# Altium PCB D1.PcbDoc (part 1 of 2)
Units mm, origin at the board's own origin, x right, y up, seen from the top; angles counter-clockwise.
Board outline 109.98 x 80.01 mm, 2 copper layers (Top Layer, Bottom Layer); 249 components, 156 nets, 1213 pads, 95 vias.
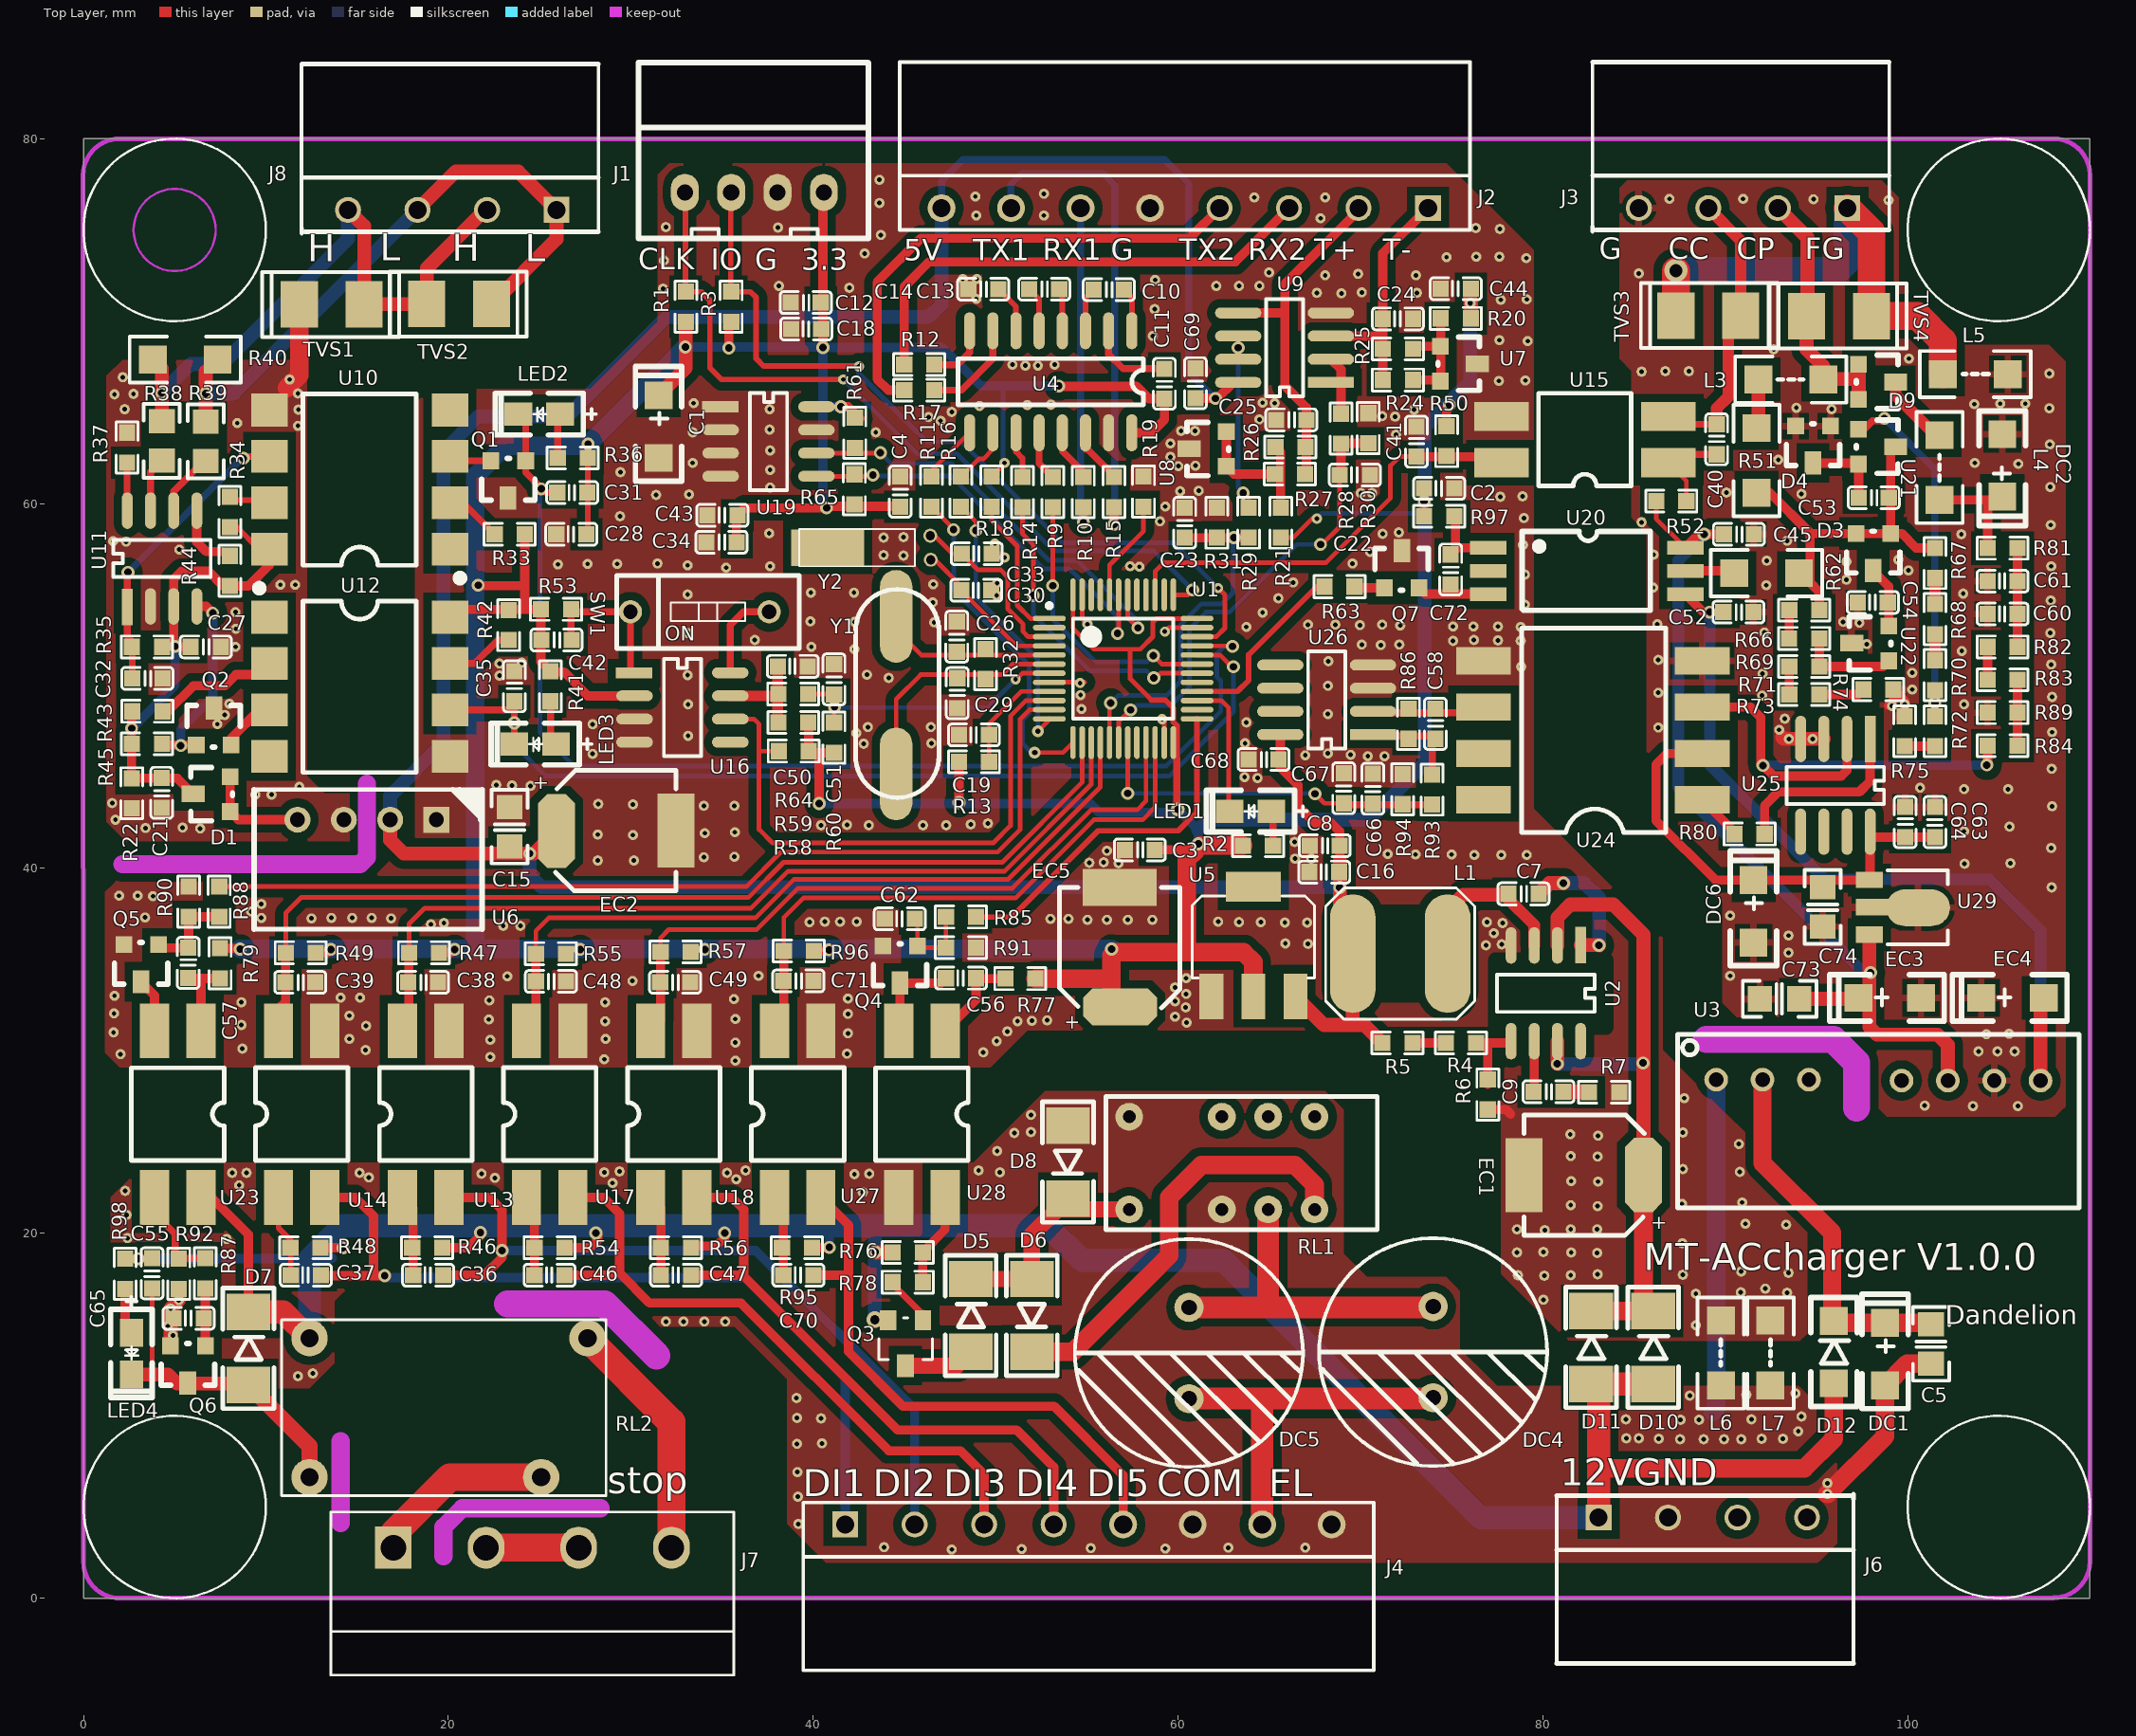
[diagram p0: Top Layer view]
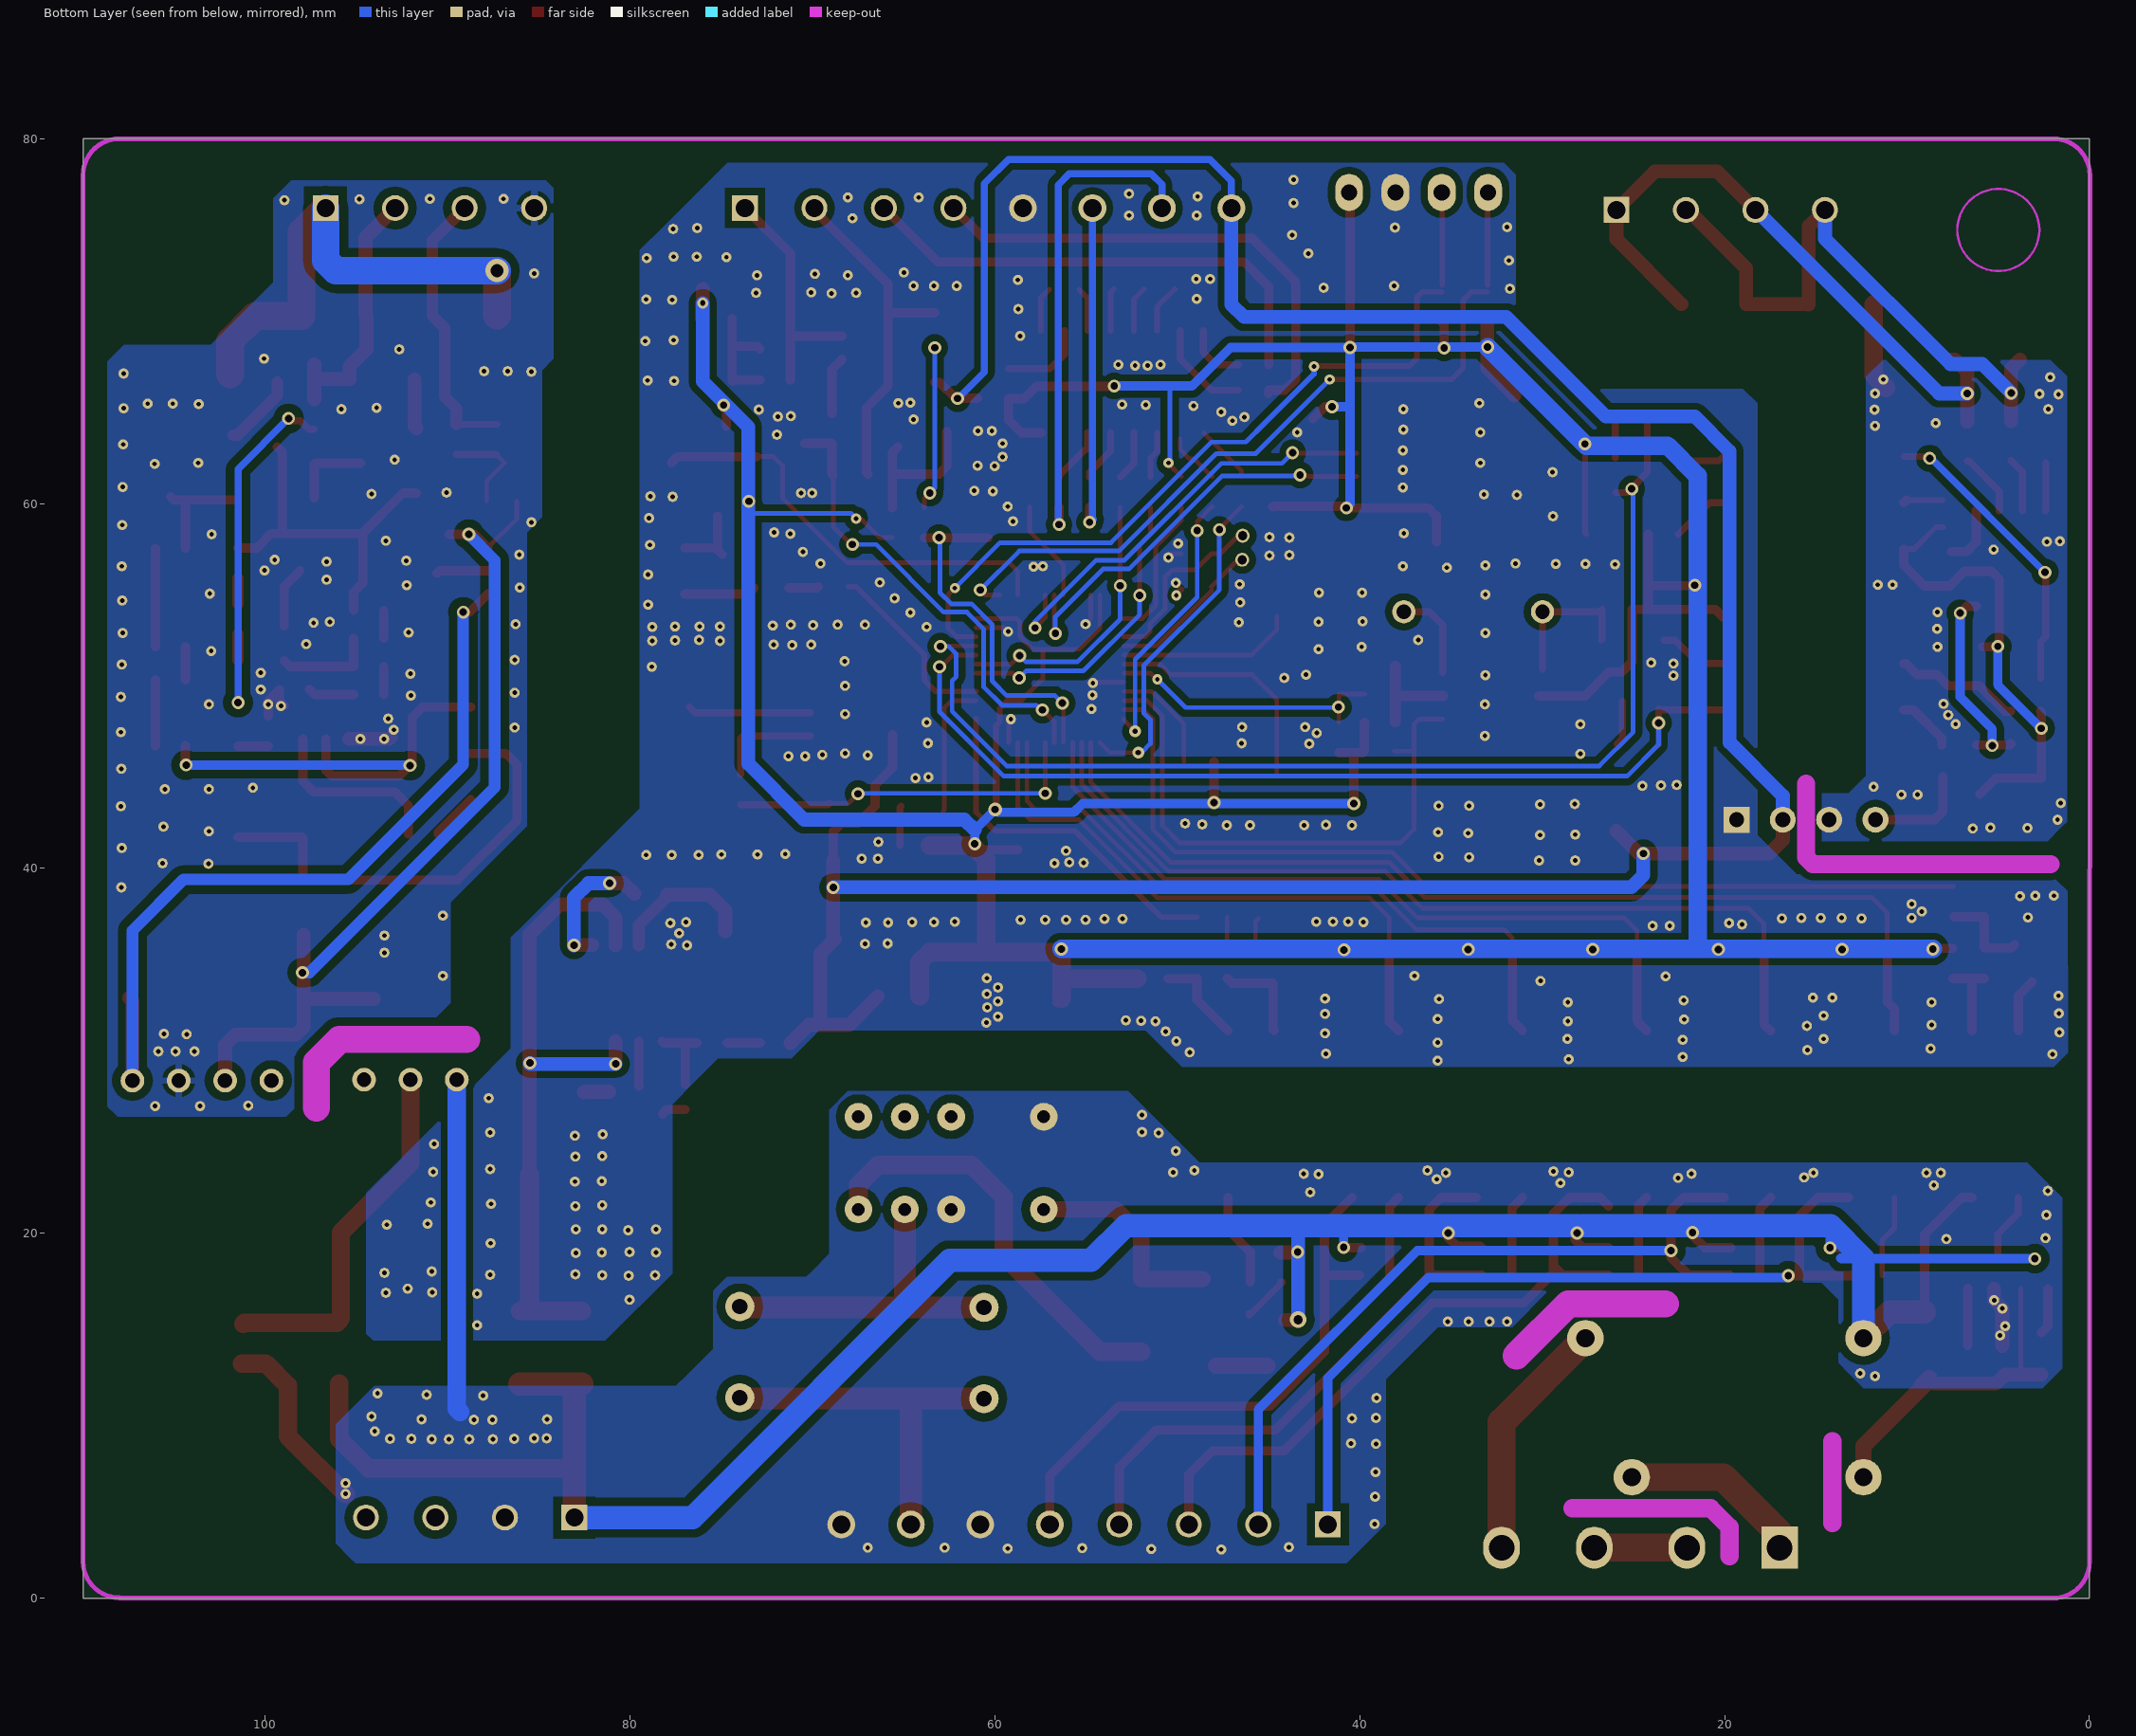
[diagram p1: Bottom Layer view, seen from below]

## Layer stack, top to bottom
Top Layer: signal copper 0.0356
Dielectric: core 0.32, FR-4, Dk 4.8
Bottom Layer: signal copper 0.0356

## Board outline
0,0 0,2.388 0,80.01 109.982,80.01 109.982,0

## Design rules (kind name [scope] priority, off if disabled: settings)
Clearance [InPoly] p1: gap=0.381
Clearance Clearance_1 [All] p2: gap=0.178
ComponentClearance [All] p1 off: gap=0.025 collisioncheckmode=3 verticalgap=0.025 showdistances=FALSE
FabricationTestpoint [(IsPad And (OnTopLayer Or OnBottomLayer))] p1: side=3 testpointundercomponent=TRUE minsize=1.016 maxsize=2.54 preferedsize=1.524 minholesize=0 maxholesize=1.016 preferedholesize=0.813 testpointgrid=0.025 allowsidetop=TRUE allowsidebottom=TRUE usegrid=TRUE gridtolerance=0
HoleSize [All] p1: absolutevalues=TRUE maxlimit=5.08 minlimit=0.025 maxpercent=80.000 minpercent=20.000
MinimumSolderMaskSliver [All] p1: minsoldermaskwidth=0
PlaneConnect [All] p1: planeconnectstyle=Direct reliefexpansion=0.508 reliefentries=4 reliefconductorwidth=0.254 reliefairgap=0.254
PolygonConnect [IsVia] p1: connectstyle=Direct reliefconductorwidth=0.254 reliefentries=4 polygonreliefangle="90 Angle" airgapwidth=0.254
PolygonConnect PolygonConnect_1 [All] p2: connectstyle=Direct reliefconductorwidth=0.381 reliefentries=4 polygonreliefangle="90 Angle" airgapwidth=0.254
RoutingVias [All] p1: holewidth=0.711 width=1.27 viastyle="Through Hole" minholewidth=0.254 minwidth=0.254 maxholewidth=0.711 maxwidth=1.27
SilkToSilkClearance [All] p1: silktosilkclearance=0
SilkToSolderMaskClearance [IsPad] p1: minsilkscreentomaskgap=0 clearancetoexposedcopper=TRUE
SolderMaskExpansion [All] p1: expansion=0.102
Width [All] p1: maxlimit=10 minlimit=0.127 preferedwidth=0.254
21 further rules are at their usual default settings.

## Components (designator, comment, footprint, x,y, rotation, side; value= is the part's Value field where it differs from the comment)
C1 "10uF,16V" CA1206 31.521,65.938 r90 top
C2 "104" 0603C 74.32,60.833 r180 top
C3 "104" 0603C 57.912,41.021 r0 top
C4 "104" 0603C 44.78,60.655 r270 top
C5 "104" 0805C 101.27,12.878 r90 top
C7 "103" 0603C 78.943,38.608 r0 top
C8 "104" 0603C 68.047,41.25 r0 top
C9 "3.9nF" 0603C 80.315,27.762 r0 top
C10 "0.1uF" 0603C 56.211,71.733 r0 top
C11 "0.1uF" 0603C 59.258,66.573 r270 top
C12 "0.1uF" 0603C 39.599,71.018 r0 top
C13 "0.1uF" 0603C 52.667,71.759 r0 top
C14 "0.1uF" 0603C 49.327,71.759 r0 top
C15 "1uF" 0805C 23.343,41.224 r90 top
C16 "0.1uF" 0603C 68.021,39.802 r180 top
C18 "0.1uF" 0603C 39.624,69.571 r180 top
C19 "10nF" 0603C 48.819,47.32 r180 top
C21 "0.1uF" 0603C 4.293,44.145 r270 top
C22 "103" 0603C 69.698,61.57 r180 top
C23 "103" 0603C 60.376,58.953 r270 top
C24 "103" 0603C 72.06,70.129 r180 top
C25 "103" 0603C 66.218,64.592 r0 top
C26 "22pF" 0603C 47.879,52.705 r270 top
C27 "104" 0603C 6.706,52.146 r0 top
C28 "104" 0603C 26.746,58.318 r180 top
C29 "22pF" 0603C 47.904,49.606 r90 top
C30 "15pF" 0603C 48.946,55.245 r180 top
C31 "100pF" 0603C 26.797,60.604 r180 top
C32 "220pF" 0603C 3.505,50.419 r0 top
C33 "15pF" 0603C 48.971,57.252 r180 top
C34 "104" 0603C 34.976,57.887 r0 top
C35 "100pF" 0603C 23.622,49.987 r90 top
C36 "104" 0603C 18.898,17.704 r180 top
C37 "104" 0603C 12.192,17.704 r180 top
C38 "104" 0603C 18.618,33.757 r0 top
C39 "104" 0603C 11.887,33.757 r0 top
C40 "104" 0603C 89.535,63.525 r90 top
C41 "104" 0603C 73.076,63.398 r90 top
C42 "104" 0603C 25.933,52.527 r0 top
C43 "0.1uF" 0603C 35.027,59.36 r180 top
C44 "104" 0603C 75.235,71.78 r180 top
C45 "104" 0603C 90.754,58.318 r0 top
C46 "104" 0603C 25.552,17.704 r180 top
C47 "104" 0603C 32.487,17.704 r180 top
C48 "104" 0603C 25.629,33.807 r0 top
C49 "104" 0603C 32.436,33.757 r0 top
C50 "104" 0603C 38.887,51.079 r180 top
C51 "104" 0603C 41.148,50.368 r270 top
C52 "104" 0603C 90.729,54.051 r0 top
C53 "104" 0603C 98.146,60.325 r0 top
C54 "104" 0603C 98.095,54.585 r180 top
C55 "104" 0603C 3.759,17.805 r270 top
C56 "104" 0603C 48.108,33.985 r180 top
C57 "104" 0603C 5.74,34.823 r90 top
C58 "103" 0603C 74.117,47.93 r90 top
C60 "104" 0603C 105.207,53.95 r180 top
C61 "103" 0603C 105.207,55.753 r180 top
C62 "104" 0603C 44.755,37.236 r180 top
C63 "104" 0603C 101.498,42.545 r270 top
C64 "104" 0603C 99.873,42.545 r90 top
C65 "104" 0603C 5.766,15.342 r180 top
C66 "104" 0603C 70.688,44.374 r270 top
C67 "103" 0603C 69.088,44.399 r270 top
C68 "104" 0603C 64.694,45.974 r0 top
C69 "104" 0603C 60.96,66.599 r270 top
C70 "104" 0603C 39.192,17.704 r180 top
C71 "104" 0603C 39.192,33.833 r0 top
C72 "100pF" 0603C 74.955,56.388 r270 top
C73 "0.1uF" 0805C 91.923,32.868 r0 top
C74 "0.1uF" 0805C 95.326,36.83 r90 top
D1 "BAV54C" SOT23#1 8.052,43.129 r90 top
D3 "BAV54C" SOT23#1 99.06,58.369 r180 top
D4 "BAV54C" SOT23#1 95.758,64.262 r180 top
D5 "1N4007" DO-214AC 48.641,15.494 r90 top
D6 "1N4007" DO-214AC 51.994,15.494 r270 top
D7 "1N4007" DO-214AC 9.042,13.691 r90 top
D8 "1N4007" DO-214AC 53.975,23.901 r270 top
D9 "BAV54C" SOT23#1 97.307,67.615 r270 top
D10 "1N4007" DO-214AC 86.055,13.741 r90 top
D11 "1N4007" DO-214AC 82.652,13.741 r90 top
D12 "B2020W" 1206D 95.961,13.487 r90 top
DC1 "10uF,16V" CA1206 98.755,15.086 r90 top
DC2 "10uF,16V" CA1206 105.207,60.376 r270 top
DC4 "2200uF/25V" CAP12.5*20 73.99,13.487 r270 top
DC5 "2200uF/25V" CAP12.5*20 60.604,13.437 r270 top
DC6 "10uF,16V" CA1206 91.542,39.37 r90 top
EC1 "100uF,25V" C100UF16VEJ 85.522,23.19 r180 top
EC2 "100uF/35V" C100UF16VEJ 25.933,42.062 r0 top
EC3 "10uF,25V" CA1206 97.307,32.893 r180 top
EC4 "10uF,25V" CA1206 104.038,32.893 r180 top
EC5 "100uF/35V" C100UF16VEJ 56.82,32.41 r90 top
J1 "CON4" CON04_2.54 36.779,77.064 r0 top
J2 "CON8" KF2EDG-8P-3.81mm 73.711,76.2 r180 top
J3 "HEADER 4" KF2EDG-4P-3.81mm 96.698,76.2 r180 top
J4 "CON8" KF2EDG-8P-3.81mm 41.758,4.039 r0 top
J6 "HEADER 4" KF2EDG-4P-3.81mm 83.058,4.42 r0 top
J7 "4 HEADER" CON-5.08MM-4P 24.613,2.769 r0 top locked (schematic designator JP1)
J8 "4 HEADER" KF2EDG-4P-3.81mm 25.933,76.098 r180 top
L1 "22uH" LC7*7*3_L 72.187,35.331 r180 top locked
L3 "100uH" 1206L#1 93.599,66.802 r180 top
L4 "100uH" 1206L#1 101.752,61.976 r270 top
L5 "100uH" 1206L#2 101.93,67.081 r0 top
L6 "1uH" 1206L#1 89.764,13.437 r90 top
L7 "1uH" 1206L#1 92.481,13.437 r90 top
LED1 "Green" D0805 65.126,43.129 r270 top
LED2 "Green" D0805 26.137,64.897 r270 top
LED3 "Green" D0805 25.908,46.812 r270 top
LED4 "Green" D0805 2.642,14.554 r0 top
Q1 "8550" SOT23#1 24.232,62.357 r180 top
Q2 "8550" SOT23#1 6.198,46.761 r0 top
Q3 "AO3407" SOT-23L 46.025,15.24 r180 top
Q4 "9013" SOT23#2 45.72,35.763 r180 top
Q5 "9013" SOT23#2 4.115,35.839 r180 top
Q6 "9013" SOT23#2 6.68,13.851 r180 top
Q7 "8550" SOT23#1 71.323,55.372 r0 top
R1 "10K" 0603R 33.02,70.79 r270 top
R2 "4.7K" 0603R 64.389,41.25 r180 top
R3 "10K" 0603R 35.509,70.79 r270 top
R4 "1.2k/1%" 0603R 75.514,30.429 r0 top
R5 "43k/1%" 0603R 72.034,30.429 r0 top
R6 "10k/1%" 0603R 76.987,27.61 r270 top
R7 "6.8k" 0603R 83.363,27.737 r0 top
R9 "0R" 0603R 53.145,60.63 r90 top
R10 "10R" 0603R 54.817,60.63 r270 top
R11 "0R" 0603R 46.482,60.655 r90 top
R12 "10R" 0603R 45.822,67.615 r180 top
R13 "0R" 0603R 48.819,45.847 r0 top
R14 "0R" 0603R 51.473,60.63 r90 top
R15 "10R" 0603R 56.49,60.63 r270 top
R16 "0R" 0603R 48.108,60.655 r90 top
R17 "10R" 0603R 45.822,66.218 r180 top
R18 "0R" 0603R 49.784,60.655 r90 top
R19 "0R" 0603R 58.115,60.655 r270 top
R20 "100R" 0603R 75.235,70.155 r0 top
R21 "100R" 0603R 65.634,58.953 r270 top
R22 "Res Semi" 0603R 2.642,44.12 r90 top
R24 "4k7/1%" 0603R 72.06,66.777 r0 top
R25 "4k7/1%" 0603R 72.06,68.478 r0 top
R26 "4k7/1%" 0603R 66.167,63.106 r180 top
R27 "4k7/1%" 0603R 66.142,61.62 r180 top
R28 "2k/1%" 0603R 68.936,64.11 r90 top
R29 "2k/1%" 0603R 63.881,58.953 r90 top
R30 "4k7/1%" 0603R 70.434,64.135 r270 top
R31 "4k7/1%" 0603R 62.128,58.953 r270 top
R32 "1MR" 0603R 49.454,51.206 r270 top
R33 "75R" 0603R 23.368,58.318 r0 top
R34 "NC" 0603R 8.026,59.538 r270 top
R35 "1.2k" 0603R 3.48,52.146 r0 top
R36 "5.1K" 0603R 26.822,62.509 r0 top
R37 "20k" 0603R 2.388,63.068 r90 top
R38 "10R" 0805R 4.293,62.357 r90 top
R39 "10R" 0805R 6.706,62.332 r90 top
R40 "120R/NC" 1206R 7.366,67.894 r180 top
R41 "1.2K" 0603R 25.603,49.987 r270 top
R42 "NC" 0603R 23.317,53.34 r270 top
R43 "150R" 0603R 3.505,48.616 r0 top
R44 "10k" 0603R 8.026,56.312 r90 top
R45 "10K" 0603R 3.48,46.838 r0 top
R46 "10K" 0603R 18.847,19.202 r0 top
R47 "10K" 0603R 18.669,35.382 r0 top
R48 "10K" 0603R 12.167,19.202 r0 top
R49 "10K" 0603R 11.913,35.382 r0 top
R50 "10K" 0603R 74.727,63.424 r270 top
R51 "1K" 1206R 91.719,60.579 r90 top
R52 "10K" 0603R 87.046,60.147 r0 top
R53 "10K" 0603R 25.908,54.204 r180 top
R54 "10K" 0603R 25.552,19.202 r0 top
R55 "10K" 0603R 25.629,35.331 r0 top
R56 "10K" 0603R 32.487,19.202 r0 top
R57 "10K" 0603R 32.461,35.433 r0 top
R58 "10K" 0603R 38.938,46.431 r180 top
R59 "10K" 0603R 38.913,48.006 r180 top
R60 "10K" 0603R 41.148,47.168 r90 top
R61 "10k" 0603R 42.291,63.881 r270 top
R62 "10R" 1206R 94.056,56.185 r180 top
R63 "1k" 0603R 68.859,55.448 r0 top
R64 "1K" 0603R 38.913,49.555 r0 top
R65 "10K" 0603R 42.266,60.782 r90 top
R66 "20K/1%" 0603R 94.336,54.153 r0 top
R67 "4K7/1%" 0603R 101.498,56.744 r90 top
R68 "51R/1%" 0603R 101.498,53.67 r90 top
R69 "2K7/1%" 0603R 94.335,52.612 r180 top
R70 "1K1/1%" 0603R 101.498,50.597 r90 top
R71 "1K1/1%" 0603R 94.336,51.071 r0 top
R72 "2K7/1%" 0603R 101.498,47.523 r90 top
R73 "51R/1%" 0603R 94.336,49.53 r180 top
R74 "4K7/1%" 0603R 98.4,49.809 r180 top
R75 "20K/1%" 0603R 99.847,47.523 r270 top
R76 "10K" 0603R 45.187,18.948 r180 top
R77 "1K" 0603R 51.359,33.96 r180 top
R78 "5.1K" 0603R 45.187,17.323 r180 top
R79 "2K" 0603R 7.493,34.798 r90 top
R80 "200R/1%" 0603R 91.338,41.885 r180 top
R81 "10R" 0603R 105.207,57.556 r0 top
R82 "33K/1%" 0603R 105.207,52.146 r180 top
R83 "33K/1%" 0603R 105.207,50.343 r0 top
R84 "31K6/1%" 0603R 105.207,46.736 r180 top
R85 "2K" 0603R 48.108,37.338 r180 top
R86 "100K/1%" 0603R 72.644,47.93 r90 top
R87 "5.1K" 0603R 6.68,17.805 r270 top
R88 "10K" 0603R 7.442,38.176 r90 top
R89 "10K/1%" 0603R 105.207,48.539 r0 top
R90 "3K" 0603R 5.766,38.176 r90 top
R91 "10K" 0603R 48.108,35.662 r180 top
R92 "4K7" 0603R 5.232,17.78 r270 top
R93 "10K/1%" 0603R 73.939,44.323 r270 top
R94 "20K/1%" 0603R 72.326,44.345 r90 top
R95 "10K" 0603R 39.116,19.202 r0 top
R96 "10K" 0603R 39.218,35.484 r0 top
R97 "200R" 0603R 74.32,59.309 r0 top
R98 "10K" 0603R 2.286,17.78 r270 top
RL1 "G6S-2" G6S-2 57.328,26.391 r0 top
RL2 "JQ1P-12V" HF32F-12V 12.395,7.645 r180 top
SW1 "拨码开关" SW1 29.972,54.077 r270 top
TVS1 "BA301N" 3528TVS 13.614,70.917 r0 top
TVS2 "BA301N" 3528TVS 20.599,70.942 r0 top
TVS3 "BA301N" 3528TVS 89.078,70.307 r180 top
TVS4 "BA301N" 3528TVS 96.241,70.282 r0 top
U1 "STM32F103C8T6" LQFP48_N 56.998,50.952 r0 top locked
U2 "EUP3484" SOP8#1 82.067,35.687 r270 top
U3 "WRA1215S-3WR2" WRA1215S-3WR2 98.4,28.397 r0 top (schematic designator U8)
U4 "SP3232" SO-16 57.48,69.469 r270 top
U5 "AMS1117-3.3" SOT223 64.135,35.992 r0 top locked
U6 "B0505D-1W" B0505S-1WR2 19.355,42.672 r180 top
U7 "TL431" SOT23#1 74.371,68.605 r270 top
U8 "TL431" SOT23#1 62.662,62.052 r90 top
U9 "LM258" SOP8#2 68.377,66.65 r180 top
U10 "6N136" LC-SMD-8_6.3mm 15.138,61.316 r90 top
U11 "PCA82C251T" SOP8#1 2.413,54.458 r90 top
U12 "6N136" LC-SMD-8_6.3mm 15.138,49.962 r270 top
U13 "PS2501L-1" DIP-4 17.483,21.976 r180 top
U14 "PS2501L-1" DIP-4 10.684,21.976 r180 top
U15 "PS2501L-1" DIP-4 86.868,62.23 r270 top
U16 "SP706SEN" SOP8#1 30.302,50.724 r0 top
U17 "PS2501L-1" DIP-4 24.281,21.976 r180 top
U18 "PS2501L-1" DIP-4 31.08,21.976 r180 top
U19 "AT24C16" SOP8#1 35.027,65.303 r0 top
U20 "W314" "w314 - duplicate" 77.013,57.582 r270 top
U21 "CJ431" SOT23#1 97.307,64.059 r270 top
U22 "CJ431" SOT23#2 98.984,51.384 r90 top
U23 "PS2501L-1" DIP-4 6.452,31.09 r0 top
U24 "HCNR201" "HCNR201 - S" 88.748,43.764 r180 top
U25 "LM258" SOP8#2 97.942,47.092 r270 top
U26 "LM258" SOP8#2 70.688,47.346 r180 top
U27 "PS2501L-1" DIP-4 37.879,21.976 r180 top
U28 "PS2501L-1" DIP-4 47.244,31.09 r0 top
U29 "LM78L05" SOT-89 97.892,39.37 r270 top
Y1 "8MHz" ZS_SMD 44.552,45.187 r90 top
Y2 "32.768KHz" ZS-32.768 43.688,57.582 r180 top

## Footprints (in the part's own frame and the unit in brackets; to place one, negate y for a bottom-side part, rotate by r counter-clockwise, add the part's x,y. Pads: shape width x height; smd on the part's side, far side on the other; paste and mask are expansions set on the pad)
0603C [mil]
  rect 35x35 smd: 1(-32.5,0) 2(32.5,0)
  silkscreen extent -55,-24 55,24
0603R [mil]
  rect 35x35 smd: 1(-32.5,0) 2(32.5,0)
  silkscreen extent -55,-24 55,24
0805C [mil]
  rect 52x56 smd: 1(-0.58,-0.68) 2(84.42,-0.68)
  silkscreen extent -38,-40 121,38
0805R [mil]
  rect 52x56 smd: 1(0,0) 2(85,0)
  silkscreen extent -37,-39 122,39
1206D [mil]
  rect 60x60 smd: 1(-67.5,0) 2(67.5,0)
  silkscreen extent -118,-50 118,50
1206L#1 [mil]
  rect 60x60 smd: 1(-70,0) 2(70,0)
  silkscreen extent -120,-50 120,50
1206L#2 [mil]
  rect 60x60 smd: 1(0.16,0.47) 2(140.16,0.47)
  silkscreen extent -50,-50 190,50
1206R [mil]
  rect 60x60 smd: 1(0.33,-0.04) 2(140.33,-0.04)
  silkscreen extent -50,-50 190,50
3528TVS [mil]
  rect 80x100 smd: 1(70,0) 2(-70,0)
  silkscreen extent -150,-70 146,70
B0505S-1WR2 [mil]
  rect 56x56 hole 32: 1(0,0)
  round 56 hole 32: 4(100,0) 5(300,0) 7(200,0)
  silkscreen extent -98,-65 394,236
C100UF16VEJ [mil]
  oct 80x160 smd: 1(-0.01,-0.43)
  rect 80x160 smd: 2(257.94,0.35)
  silkscreen extent -2,-130 258,130
CA1206 [mil]
  rect 60x60 smd: 1(-0.08,-0.48) 2(-135.08,-0.48)
  silkscreen extent -185,-50 62,50
CAP12.5*20 [mm]
  round 1.6 hole 0.85: 1(-2.5,0) 2(2.5,0)
  silkscreen extent -6.25,-6.25 6.25,6.25
CON04_2.54 [mil]
  oval 60x80 hole 35: 1(-150,0) 2(-50,0) 3(50,0) 4(150,0)
  silkscreen extent -250,-100 246,280
CON-5.08MM-4P [mm] "CON-5.08MM-4P"
  rect 2x2.3 hole 1.4: 1(-7.62,0)
  oval 2x2.3 hole 1.4: 2(-2.54,0) 3(2.54,0) 4(7.62,0)
  silkscreen extent -11.04,-6.98 11.04,1.96
D0805 [mil]
  rect 50x60 smd: 1(-0.34,-0.09) 2(-0.34,-90.09)
  silkscreen extent -45,-140 45,77
DIP-4 [mm]
  rect 1.6x3 smd: 1(-0.008,0.015) 2(-2.548,0.015) 3(-2.548,-9.129) 4(-0.008,-9.129)
  silkscreen extent -3.82,-7.1 1.26,-2.02
DO-214AC [mm]
  rect 2x2.4 smd: 1(-2,0) 2(2,0)
  silkscreen extent -3.3,-1.4 3.3,1.4
G6S-2 [mil]
  round 60 hole 27.56: 1(0,-200) 3(200,-200) 4(300,-200) 5(400,-200) 8(400,0) 9(300,0) 10(200,0) 12(0,0)
  silkscreen extent -50,-244 535,43
"HCNR201 - S" [mm]
  rect 3x1.5 smd: 1(0,0) 2(0,-2.54) 3(0,-5.08) 4(0,-7.62) 5(12,-7.62) 6(12,-5.08) 7(12,-2.54) 8(12,0)
  silkscreen extent 2,-9.41 9.9,1.79
HF32F-12V [mm]
  round 2 hole 1: 1(0,1.016) 2(0,-6.604) 3(-12.7,1.016) 4(-15.24,-6.604)
  silkscreen extent -16.26,-7.62 1.52,2.03
KF2EDG-4P-3.81mm [mil]
  rect 56x56 hole 39.37: 1(0,0)
  round 56 hole 39.37: 2(150,0) 3(300,0) 4(450,0)
  silkscreen extent -91,-315 550,50
KF2EDG-8P-3.81mm [mil]
  rect 56x56 hole 39.37: 1(0,0)
  round 56 hole 39.37: 2(150,0) 3(300,0) 4(450,0)
  round 60 hole 39.37: 5(600,0) 6(750,0) 7(900,0) 8(1050,0)
  silkscreen extent -91,-315 1141,47
LC7*7*3_L [mm]
  oval 2.5x6.5 smd: 1(-2.6,0) 2(2.6,0)
  Top Layer pour cut-out: -1.803,2.705 1.854,2.705 1.854,-2.705 -1.803,-2.705
  silkscreen extent -4.09,-3.61 4.09,3.61, body extent -2.46,-2.4 1.85,2.4, height 3.5
LC-SMD-8_6.3mm [mm]
  rect 1.8x2 smd: 1(-3.81,-4.95) 2(-1.27,-4.95) 3(1.27,-4.95) 4(3.81,-4.95) 5(3.81,4.95) 6(1.27,4.95) 7(-1.27,4.95) 8(-3.81,4.95)
  silkscreen extent -5.6,-5.7 4.7,3.1
LQFP48_N [mm] "Thin QFP, 48-Leads, Body 7x7mm, Pitch 0.5mm, IPC Medium Density"
  oval 1.8x0.3 smd: 1(-4.05,2.75) 2(-4.05,2.25) 3(-4.05,1.75) 4(-4.05,1.25) 5(-4.05,0.75) 6(-4.05,0.25) 7(-4.05,-0.25) 8(-4.05,-0.75) 9(-4.05,-1.25) 10(-4.05,-1.75) 11(-4.05,-2.25) 12(-4.05,-2.75) 25(4.05,-2.75) 26(4.05,-2.25) 27(4.05,-1.75) 28(4.05,-1.25) 29(4.05,-0.75) 30(4.05,-0.25) 31(4.05,0.25) 32(4.05,0.75) 33(4.05,1.25) 34(4.05,1.75) 35(4.05,2.25) 36(4.05,2.75)
  oval 0.3x1.8 smd: 13(-2.75,-4.05) 14(-2.25,-4.05) 15(-1.75,-4.05) 16(-1.25,-4.05) 17(-0.75,-4.05) 18(-0.25,-4.05) 19(0.25,-4.05) 20(0.75,-4.05) 21(1.25,-4.05) 22(1.75,-4.05) 23(2.25,-4.05) 24(2.75,-4.05) 37(2.75,4.05) 38(2.25,4.05) 39(1.75,4.05) 40(1.25,4.05) 41(0.75,4.05) 42(0.25,4.05) 43(-0.25,4.05) 44(-0.75,4.05) 45(-1.25,4.05) 46(-1.75,4.05) 47(-2.25,4.05) 48(-2.75,4.05)
  silkscreen extent -4.17,-2.75 2.75,3.57, body extent -3.5,-3.5 3.5,3.5, height 1.6
SO-16 [mil]
  oval 80x24 smd: 1(-0.2,-0.3) 2(-0.2,-50.3) 3(-0.2,-100.3) 4(-0.2,-150.3) 5(-0.2,-200.3) 6(-0.2,-250.3) 7(-0.2,-300.3) 8(-0.2,-350.3) 9(219.8,-350.3) 10(219.8,-300.3) 11(219.8,-250.3) 12(219.8,-200.3) 13(219.8,-150.3) 14(219.8,-100.3) 15(219.8,-50.3) 16(219.8,-0.3)
  silkscreen extent 60,-375 160,25
SOP8#1 [mm]
  rect 2x0.6 smd: 1(-0.123,0.006)
  oval 2x0.6 smd: 2(-0.093,-1.264) 3(-0.093,-2.534) 4(-0.093,-3.804) 5(5.157,-3.804) 6(5.157,-2.534) 7(5.157,-1.264) 8(5.157,0.006)
  silkscreen extent 1.52,-4.57 3.55,0.77
SOP8#2 [mm]
  rect 2.54x0.6 smd: 1(-0.006,0.006)
  oval 2.54x0.6 smd: 2(-0.006,-1.264) 3(-0.006,-2.534) 4(-0.006,-3.804) 5(5.074,-3.804) 6(5.074,-2.534) 7(5.074,-1.264) 8(5.074,0.006)
  silkscreen extent 1.52,-4.57 3.55,0.77
SOT23#1 [mil]
  rect 36x36 smd: 1(-0.49,0.35) 3(74.51,0.35)
  rect 36x50 smd: 2(37.51,80.35)
  silkscreen extent -20,-5 95,85
SOT23#2 [mil]
  rect 36x36 smd: 1(-0.08,0.75) 3(74.92,0.75)
  rect 36x50 smd: 2(37.92,80.75)
  silkscreen extent -20,-4 95,86
SOT223 [mm]
  rect 1.3x2.5 smd: 1(-2.3,-3) 2(0,-3) 3(2.3,-3)
  rect 3x1.65 smd: 4(0,3)
  silkscreen extent -3.35,-2.01 3.35,2.5
SOT-23L [mm]
  rect 0.9x1.1 smd: 1(0,0) 3(1.905,0)
  rect 0.914x1.27 smd: 2(0.965,2.5)
  silkscreen extent -0.51,-0.13 2.41,2.16
SOT-89 [mm]
  rect 0.9x1.473 smd: 1(0,0.006) 3(2.994,0.006)
  rect 0.9x2 smd: 2(1.494,0.273)
  oval 2.032x3.5 smd: 2(1.519,2.686)
  silkscreen extent -0.53,1.02 3.53,4.32
SW1 [mm]
  round 1.27 hole 0.8: 1(0.011,0.015) 2(0.011,7.62)
  silkscreen extent -1.99,-0.74 2.01,9.26
"w314 - duplicate" [mm]
  rect 0.76x2 smd: 1(0,0) 2(1.27,0) 3(2.54,0) 4(2.54,10.8) 5(1.27,10.8) 6(0,10.8)
  silkscreen extent -0.89,1.85 3.43,8.89
WRA1215S-3WR2 [mm] "WRA1215S-3WR2"
  round 1.3 hole 0.8: 1(-8.89,0.025) 2(-6.35,0.025) 3(-3.81,0.025) 5(1.27,-0.025) 6(3.81,-0.025) 7(6.35,-0.025) 8(8.89,-0.025)
  silkscreen extent -11,-7 11,2.5
ZS-32.768 [mil]
  round 30 hole 20: 1(-107.67,-26) 2(-108.67,26)
  rect 157.48x78.74 smd: 3(114,0)
  silkscreen extent -75,-40 175,40
ZS_SMD [mil]
  oval 200x70 smd: 1(0,0) 2(340,0)
  silkscreen extent -51,-92 399,88

## Part data
C1 DC2: library part CAP2, "贴片钽电容/16V/10uF/A型3216/AVX"
C2 C3 C38 C39 C48 C49 C71 C72: library part CAP, "0603贴片电容/50V/0.1uF/±10%/X7R"
C4 C19 C27 C28 C29 C31 C32 C33 C34 C35 C36 C37 C42 C43 C44 C45 C46 C47 C50 C51 C52 C53 C54 C60 C63 C64 C66 C68 C69 C70: library part CAP1, "0603贴片电容/50V/0.1uF/±10%/X7R"
C5 C8 C10 C11 C12 C13 C14 C15 C16 C18 C24 C25 C40 C41 C55 C56 C57 C62 C65 C73 C74: library part CAP, "Capacitor"
C7 C9: library part CAP
C21: library part "Cap Semi", "Capacitor (Semiconductor SIM Model)"
C22 C23: library part CAP1, "Capacitor"
C26 C30: library part CAP1, "0603贴片电容/50V/1uF/±10%/X7R"
C58 C61 C67: library part CAP1, "0603贴片电容/50V/10nF/±10%/X7R"
D5 D6 D7 D8 D10 D11 D12: library part DIODE
DC1 DC4 DC5 DC6 EC2 EC5: library part CAP2
EC1: library part "CAPACITOR POL", "贴片铝电解电容/16V/100uF/6.3*5.4"
EC3 EC4: library part "CAPACITOR POL", "Capacitor"
J1: "Connector"
J3 J6: library part "4 HEADER", "4 Pin Header"
J7 J8: "4 Pin Header"
L1 L3 L6 L7: library part INDUCTOR
L4 L5: library part INDUCTOR, "贴片功率电感/100uH/LC7*7*3"
LED1 LED2 LED3 LED4: library part LED, "17-21/GHC-XS1T2M/3T,绿色LED/0805/亿光"
Q1 Q2 Q7: library part PNP, "PNP Transistor"
Q3: library part PMOS
Q4 Q5 Q6: library part NPN
R1 R3 R13 R18 R19 R24 R25 R26 R27 R28 R29 R30 R31 R32 R33 R34 R35 R36 R37 R38 R39 R40 R41 R42 R43 R44 R45 R50 R76 R77 R78 R79 R85 R87 R88 R90 R91 R92 R98: library part RES1
R2 R63 R97: library part RES1, "0603贴片电阻/200R/0.1W/±5%"
R4 R5 R6 R7: library part R_S
R9 R10 R11 R12 R14 R15 R16 R17 R20 R21 R52: library part RES-1, "RES"
R22: "Semiconductor Resistor"
R46 R48 R54 R56 R95: library part RES1, "0603贴片电阻/2K/0.1W/±5%"
R47 R49 R53 R55 R57 R58 R59 R60 R61 R65 R96: library part RES1, "0603贴片电阻/10K/0.1W/±5%"
R51: library part RES2, "五色环/轴状/金属膜电阻/1K/1W/±1%"
R62: library part RES1, "0603贴片电阻/10R/0.1W/±5%"
R64: library part RES1, "0603贴片电阻/47R/0.1W/±5%"
R66 R75: library part RES1, "0603贴片电阻/20K/0.1W/±1%"
R67 R74: library part RES1, "0603贴片电阻/4.7K/0.1W/±1%"
R68 R73: library part RES1, "0603贴片电阻/51R/0.1W/±1%"
R69 R72: library part RES1, "0603贴片电阻/2.7K/0.1W/±1%"
R70 R71: library part RES1, "0603贴片电阻/1.1K/0.1W/±1%"
R80: library part RES1, "0603贴片电阻/200R/0.1W/±1%"
R81 R82 R83 R89: library part RES1, "0603贴片电阻/33K/0.1W/±1%"
R84 R86: library part RES1, "0603贴片电阻/31.6K/0.1W/±1%"
R93 R94: library part RES1, "0603贴片电阻/10K/0.1W/±1%"
SW1: library part "SW SPST", "直插拔码开关1位/DIP2/蓝色/脚距8mm"
TVS1 TVS2 TVS3 TVS4: library part TVS
U4: library part MAX232ESE
U5: library part AMS1117
U6: library part BXXXXD-1W
U9: library part AS358P-E1
U13 U14 U17 U18 U27: library part PS2501-1, "PS2501L-1,SOP4,CEL"
U15 U23 U28: library part PS2501-1
U16: "SP706SEN,SOP8,Sipex"
U19: library part AT24C64, "EEPROM/64K/2.7V/SOP8/ATMEL"
U20: library part TLP113, "TLP114A,5_PIN,TOSHIBA"
U21 U22: library part TL431, "TL431,SOT23/ST/ON"
U24: library part HCNR200, "HCNR201,DIP8,HP"
U25 U26: library part AS358P-E1, "LM258,SOIC8,TI"
U29: library part LM7805
Y1 Y2: library part CRYSTAL, "32.768KHz晶振/圆柱形/2*6mm"

## Free pads (board coordinates)
  round 0.559 hole 0.254: 0(1.956,38.506) 0(42.266,23.241) 1(2.972,38.506) 1(43.078,23.266) 2(3.81,38.481) 2(42.723,22.25) 3(3.378,37.313) 3(5.232,16.332) 4(1.702,33.02) 4(4.623,14.91) 5(1.676,32.055) 5(4.777,15.877) 6(1.651,31.013) 6(4.902,14.402) 7(2.032,29.82) 7(2.286,22.327) 8(2.362,21.006) 8(8.661,32.664) 9(2.413,19.736) 9(8.661,31.42) 10(8.153,23.317) 10(8.712,30.124) 11(8.941,23.317) 11(9.754,38.049) 12(8.534,22.631) 12(9.754,37.287) 13(9.195,37.643) 13(15.138,23.317) 14(12.497,37.262) 14(15.646,23.063) 15(13.589,37.287) 15(21.819,23.266) 16(14.732,37.287) 16(22.555,23.038) 17(11.76,12.167) 17(15.799,37.287) 18(12.573,12.319) 18(16.866,37.262) 19(7.849,19.685) 19(14.097,32.918) 20(15.164,32.918) 20(28.55,23.343) 21(14.58,31.928) 21(29.388,23.393) 22(14.58,30.658) 22(29.007,22.758) 23(15.494,31.369) 23(35.281,23.317) 24(15.469,30.048) 24(36.297,23.444) 25(19.05,36.932) 25(35.789,22.962) 26(19.761,37.008) 26(49.073,23.444) 27(23.012,36.855) 27(50.241,23.343) 28(23.952,36.855) 28(51.029,25.502) 29(23.241,34.087) 29(51.943,25.552) 30(22.25,32.766) 30(51.943,26.492) 31(22.225,31.725) 31(50.089,24.511) 32(22.301,30.607) 32(31.928,15.164) 33(22.301,29.667) 33(32.893,15.164) 34(28.6,32.664) 34(34.036,15.164) 35(28.6,31.623) 35(35.179,15.164) 36(28.626,30.658) 36(39.091,10.973) 37(28.55,29.54) 37(40.437,9.855) 38(30.099,33.833) 38(39.116,9.881) 39(37.008,34.112) 39(39.116,8.458) 40(35.662,32.842) 40(40.488,8.484) 41(35.738,31.75) 41(39.141,6.909) 42(35.738,30.455) 42(39.167,5.563) 43(35.738,29.464) 43(39.192,4.064) 44(41.91,32.029) 44(43.891,2.794) 45(41.91,30.963) 45(47.6,2.667) 46(41.859,29.845) 46(51.435,2.692) 47(41.91,32.868) 47(55.22,2.743) 48(39.802,37.059) 48(59.309,2.718) 49(40.64,37.084) 49(62.763,2.769) 50(41.478,37.084) 50(66.98,2.769) 51(42.393,37.084) 51(107.772,67.132) 52(49.327,29.921) 52(107.772,65.227) 53(50.063,30.531) 53(107.798,63.246) 54(50.648,31.064) 54(107.823,60.909) 55(51.206,31.623) 55(107.848,58.826) 56(51.994,31.648) 56(107.874,56.566) 57(52.832,31.674) 57(107.848,54.686) 58(53.01,37.236) 58(107.823,52.908) 59(54,37.236) 59(107.874,51.181) 60(55.042,37.186) 60(107.925,49.403) 61(56.109,37.186) 61(107.925,47.473) 62(57.252,37.186) 62(107.899,45.466) 63(58.598,37.186) 63(107.925,43.409) 64(55.143,40.31) 64(107.874,41.123) 65(55.931,40.335) 65(107.899,38.964) 66(2.159,66.929) 66(56.744,40.284) 67(2.743,66.015) 67(56.109,40.97) 68(1.702,65.989) 68(60.452,33.985) 69(2.261,65.176) 69(60.452,33.122) 70(11.303,66.802) 70(60.427,32.385) 71(11.786,65.151) 71(60.477,31.547) 72(8.433,64.414) 72(59.842,33.477) 73(11.76,66.04) 73(59.842,32.715) 74(10.795,55.55) 74(59.842,31.877) 75(11.608,55.55) 75(62.205,37.084) 76(63.348,37.059) 76(96.647,56.82) 77(64.541,37.059) 77(96.647,55.829) 78(65.862,37.033) 78(96.469,53.518) 79(67.081,37.033) 79(97.358,53.467) 80(65.888,35.89) 80(92.278,56.871) 81(67.132,35.865) 81(92.253,55.524) 82(71.501,40.792) 82(92.151,52.934) 83(73.025,40.767) 83(92.05,50.673) 84(75.006,40.767) 84(92.024,49.479) 85(76.251,40.742) 85(86.284,53.391) 86(77.724,40.742) 86(93.396,57.963) 87(79.121,40.742) 87(103.657,65.456) 88(81.509,25.425) 88(103.683,62.23) 89(81.534,24.232) 89(102.946,58.318) 90(81.559,22.86) 90(103.048,55.067) 91(81.534,21.539) 91(102.972,51.918) 92(81.534,20.218) 92(103.099,48.997) 93(81.559,18.948) 93(100.686,44.425) 94(81.534,17.704) 94(103.099,44.348) 95(83.033,25.349) 95(105.512,44.348) 96(83.007,24.206) 96(90.272,37.414) 97(83.033,22.835) 97(90.272,34.112) 98(83.007,21.488) 98(93.472,35.382) 99(82.982,20.218) 99(93.472,36.322) 100(82.982,18.923) 100(103.886,29.972) 101(83.007,17.755) 101(104.927,29.972) 102(80.112,20.168) 102(105.867,29.972) 103(78.588,20.218) 103(104.318,30.912) 104(78.588,18.948) 104(105.562,30.937) 105(80.035,18.974) 105(100.254,49.809) 106(78.638,17.704) 106(100.254,50.724) 107(80.086,17.678) 107(99.149,48.908) 108(80.035,16.358) 108(99.847,48.997) 109(87.757,27.407) 109(100.051,56.337) 110(87.681,25.527) 110(99.492,56.921) 111(87.681,23.52) 111(94.793,47.098) 112(87.63,21.615) 112(93.491,47.098) 113(87.655,19.456) 113(93.269,48.209) 114(87.681,17.729) 115(88.392,16.688) 115(92.964,47.6) 116(88.392,14.961) 116(97.765,52.299) 117(86.335,51.435) 117(90.754,24.892) 118(86.335,49.632) 118(90.805,23.368) 119(86.335,47.727) 119(92.202,16.967) 120(86.081,57.201) 120(93.345,20.472) 121(86.055,55.397) 121(90.932,21.692) 122(85.42,58.979) 122(91.11,20.523) 123(85.42,67.234) 123(90.881,17.907) 124(86.716,67.259) 124(93.472,17.831) 125(88.011,67.259) 125(90.856,16.764) 126(85.268,72.619) 126(93.396,16.739) 127(105.08,65.481) 128(106.451,65.481) 129(106.07,62.179) 130(98.958,76.632) 131(94.844,76.683) 132(22.631,44.577) 132(90.983,76.708) 133(23.495,44.552) 133(86.944,76.708) 134(24.511,44.526) 134(105.588,42.291) 135(37.617,65.176) 135(105.639,40.284) 136(37.617,64.059) 136(103.099,42.037) 137(37.643,62.916) 137(103.124,40.259) 138(37.643,61.849) 138(100.94,27) 139(37.643,60.884) 139(103.581,26.975) 140(29.439,61.722) 140(106.045,26.975) 141(29.413,59.309) 141(90.068,60.604) 142(31.394,60.477) 142(92.659,68.453) 143(33.198,60.503) 143(93.904,65.253) 144(26.01,56.667) 144(95.834,65.176) 145(27.635,56.693) 145(92.913,62.408) 146(29.261,56.693) 146(94.183,60.528) 147(31.471,56.718) 147(100.076,67.945) 148(33.122,56.617) 148(85.268,8.763) 149(35.23,56.49) 149(86.36,8.738) 150(37.592,58.369) 150(87.528,8.712) 151(37.643,56.566) 151(88.824,8.712) 152(43.866,58.141) 152(89.941,8.712) 153(44.958,58.166) 153(90.881,8.712) 154(43.866,57.175) 154(91.999,8.738) 155(44.958,57.15) 155(93.167,8.738) 156(39.878,55.118) 156(94.005,9.144) 157(42.24,55.118) 157(94.183,9.957) 158(39.853,53.543) 158(91.44,9.804) 159(42.266,53.518) 159(88.57,9.779) 160(39.903,52.146) 160(87.554,9.779) 161(42.266,52.019) 161(84.557,9.804) 162(42.951,50.622) 162(84.582,8.763) 163(33.122,55.016) 163(88.062,11.1) 164(33.122,52.908) 164(91.161,11.151) 165(33.122,50.597) 165(93.853,11.227) 166(33.147,48.997) 166(95.606,6.299) 167(33.147,47.269) 167(95.606,5.715) 168(1.626,57.937) 168(28.219,43.536) 169(2.337,57.912) 169(30.124,43.51) 170(5.258,57.48) 170(28.194,41.859) 171(8.331,54.051) 171(30.124,41.834) 172(8.357,53.137) 172(28.194,40.437) 173(8.331,52.146) 173(30.175,40.437) 174(7.341,47.913) 174(34.011,43.434) 175(7.747,48.412) 175(35.687,43.434) 176(8.001,49.022) 176(34.061,41.935) 177(5.436,42.24) 177(35.712,41.986) 178(6.401,42.189) 178(34.011,40.615) 179(3.404,42.215) 179(35.687,40.64) 180(1.753,42.672) 180(43.002,47.752) 181(1.575,43.586) 181(42.774,46.838) 182(9.423,44.044) 182(46.457,47.752) 183(10.312,44.044) 183(46.482,46.863) 184(11.836,44.475) 184(44.145,50.444) 185(11.76,64.262) 185(27.915,47.904) 186(27.915,46.279) 187(43.637,77.749) 188(43.637,76.479) 189(43.713,74.727) 190(42.824,73.711) 191(41.986,71.831) 192(38.075,75.133) 193(38.125,71.933) 194(31.928,75.159) 195(31.826,73.33) 196(31.775,71.78) 197(48.895,76.835) 198(48.946,75.794) 199(52.654,76.987) 200(52.654,75.794) 201(64.186,76.784) 202(68.072,76.784) 203(58.725,70.663) 204(58.623,69.19) 205(58.75,72.263) 206(62.103,71.933) 207(63.348,71.933) 208(64.465,71.933) 209(64.999,72.669) 210(67.818,75.641) 211(68.072,72.517) 212(69.875,72.593) 213(67.615,71.552) 214(68.961,71.526) 215(70.079,71.577) 216(73.05,72.517) 217(73.101,71.552) 218(76.327,75.108) 219(77.648,75.057) 220(76.352,73.533) 221(77.622,73.533) 222(79.096,73.457) 223(79.121,71.196) 224(77.699,71.171) 225(79.172,68.91) 226(77.622,68.961) 227(77.597,66.726) 228(79.045,66.751) 229(74.727,73.508) 230(71.196,64.795) 231(71.907,64.77) 232(71.958,63.779) 233(72.949,65.151) 234(64.643,65.532) 235(65.303,65.507) 236(64.465,64.618) 237(60.173,63.983) 238(60.935,63.983) 239(59.588,63.297) 240(59.588,62.56) 241(60.02,62.052) 242(60.96,62.078) 243(60.122,60.681) 244(61.138,60.706) 245(57.379,56.566) 246(57.887,56.54) 247(66.319,55.677) 248(65.507,54.813) 249(64.643,54.026) 250(63.754,53.238) 251(67.132,53.365) 252(68.631,53.365) 253(69.977,53.34) 254(71.196,53.365) 255(72.187,53.315) 256(70.079,52.273) 257(71.12,52.248) 258(72.136,52.273) 259(75.082,53.264) 260(76.2,53.264) 261(77.546,53.264) 262(78.791,53.238) 263(75.082,52.476) 264(76.225,52.527) 265(77.546,52.502) 266(78.791,52.476) 267(77.673,60.376) 268(78.892,60.401) 269(78.969,59.207) 270(78.918,57.734) 271(79.019,56.109) 272(79.019,54.458) 273(78.816,51.054) 274(50.927,67.615) 275(51.638,67.564) 276(52.324,67.564) 277(53.238,67.615) 278(51.74,65.405) 279(53.035,65.43) 280(68.25,51.359) 281(68.224,50.013) 282(68.224,48.463) 283(68.224,46.304) 284(69.469,46.228) 285(70.409,46.152) 286(71.323,46.152) 287(66.98,46.203) 288(63.652,45.009) 289(64.364,44.958) 290(63.678,46.863) 291(63.754,48.006) 292(66.421,40.538) 293(67.31,40.538) 294(66.396,41.453) 295(40.437,42.367) 296(41.859,42.393) 297(43.053,42.367) 298(46.025,42.367) 299(47.295,42.367) 300(48.641,42.418) 301(49.581,42.469) 302(42.367,47.422) 303(36.805,52.527) 304(33.452,65.507) 305(33.401,63.906) 306(33.401,62.23) 307(46.33,64.745) 308(47.6,65.024) 309(46.99,64.541) 311(46.584,55.575) 312(46.558,54.585) 313(46.634,53.492) 314(71.222,58.344) 315(72.111,58.42) 316(70.536,57.353) 317(69.571,56.718) 318(70.028,60.579) 319(70.637,60.579) 320(54.661,49.505) 321(54.712,48.743) 322(54.635,50.165) 323(48.971,72.314) 324(48.946,71.222) 325(48.209,72.314) 326(49.124,65.354) 327(43.434,63.906) 328(59.017,59.03) 329(59.309,59.842) 330(50.495,57.048) 331(76.937,37.059) 332(77.8,37.008) 333(76.886,35.789) 334(77.749,35.839) 335(77.318,36.449) 336(22.809,51.232) 337(22.809,50.571) 338(24.028,51.283)

## Via types
v1: diameter 0.711, hole 0.406, Top Layer to Bottom Layer, 77 vias
v2: diameter 0.559, hole 0.254, Top Layer to Bottom Layer, 12 vias
v3: diameter 0.66, hole 0.305, Top Layer to Bottom Layer, 2 vias
v4: diameter 0.914, hole 0.508, Top Layer to Bottom Layer, 1 vias
v5: diameter 1.27, hole 0.711, Top Layer to Bottom Layer, 1 vias
v6: diameter 0.762, hole 0.406, Top Layer to Bottom Layer, 1 vias
v7: diameter 0.61, hole 0.305, Top Layer to Bottom Layer, 1 vias

## Nets (pads, with @x,y where several pads share a name; then routed paths per layer and width w, separated by ;. In a path a pad name is that pad's centre, name@x,y a point inside that pad or via, vN(x,y) a via of type N, cw(c..) or ccw(c..) an arc to the next point about the centre after c; other vN are vias at no path point)
/RST: C51.2 R60.2 R64.2 U1.7 | length 15.5
  Top Layer w0.254: R64.2@39.738,49.555 41.135,49.555 C51.2@41.148,49.543 R60.2@41.148,47.993 ; v2(51.105,50.368) 51.13,50.368 51.464,50.702 U1.7@52.948,50.702
  Bottom Layer w0.254: v1(41.173,48.844) 41.173,48.819 49.555,48.819 v2(51.105,50.368)
AC-SWITCH: R88.2 U1.11 | length 53.1
  Top Layer w0.254: R88.2@7.442,39.002 36.335,39.002 38.227,40.894 50.114,40.894 51.359,42.139 51.359,48.184 51.877,48.702 U1.11@52.948,48.702
ACLI: J7.1 RL2.3 | length 10.1
  Top Layer w1.524: J7.1@16.993,2.769 16.993,3.531 20.091,6.629 RL2.3@25.095,6.629
ACLO: J7.2 J7.3 | length 5.1
  Top Layer w1.524: J7.2@22.073,2.769 J7.3@27.153,2.769
ASS5V: C63.2 C64.1 C74.2 DC6.1 U24.2 U25.8 U29.1 | length 24.8
  Top Layer w0.508: U24.2@88.748,46.304 86.817,46.304 86.208,45.695 86.208,42.621 89.461,39.368 DC6.1@91.554,39.368 97.896,39.368 U29.1@97.898,39.37 97.949,39.421 97.949,41.656 98.012,41.72 C63.2@101.498,41.72
ASS_+15V: C45.1 C73.2 EC3.1 R52.1 U3.6 U20.6 U29.3 | length 50.4
  Top Layer w0.254: R52.1@86.22,60.147 86.22,59.174 U20.6@87.813,57.582
  Top Layer w0.508: U20.6@87.813,57.582 88.549,58.318 v1(88.849,58.318) C45.1@89.929,58.318
  Top Layer w0.635: v1(97.968,34.29) v1@97.968,34.347
  Top Layer w0.762: C73.2@94.067,32.85 EC3.1@97.83,32.85 ; v1@97.898,34.29 97.898,31.312 98.323,30.886 101.651,30.886 102.21,30.328 U3.6@102.21,28.372 ; v1@97.898,34.347 U29.3@97.898,36.376
  Bottom Layer w0.635: v1(88.849,58.318) 87.427,56.896 87.427,44.45 97.587,34.29 v1(97.968,34.29)
ASS_-15V: C52.1 EC4.2 U3.8 U20.4 | length 44.8
  Top Layer w0.508: U20.4@87.813,55.042 88.803,54.051 v1(89.154,54.051)
  Top Layer w0.762: U3.8@107.29,28.372 107.29,32.725 EC4.2@107.469,32.905
  Bottom Layer w0.635: v1(89.154,54.051) 89.154,45.695 95.453,39.395 104.496,39.395 107.29,36.601 U3.8@107.29,28.372
ASS_GND: C45.2 C52.2 C54.2 C60.2 C61.2 C63.1 C64.2 C73.1 C74.1 D4.1 D4.3 DC2.2 DC6.2 EC3.2 EC4.1 J3.4 L5.2 pad.51@107.772,67.132 pad.52@107.772,65.227 pad.53@107.798,63.246 pad.54@107.823,60.909 pad.55@107.848,58.826 pad.56@107.874,56.566 pad.57@107.848,54.686 pad.58@107.823,52.908 pad.59@107.874,51.181 pad.60@107.925,49.403 pad.61@107.925,47.473 pad.62@107.899,45.466 pad.63@107.925,43.409 pad.64@107.874,41.123 pad.65@107.899,38.964 pad.76@96.647,56.82 pad.77@96.647,55.829 pad.78@96.469,53.518 pad.79@97.358,53.467 pad.80@92.278,56.871 pad.81@92.253,55.524 pad.82@92.151,52.934 pad.83@92.05,50.673 pad.84@92.024,49.479 pad.85@86.284,53.391 pad.86@93.396,57.963 pad.87@103.657,65.456 pad.88@103.683,62.23 pad.89@102.946,58.318 pad.90@103.048,55.067 pad.91@102.972,51.918 pad.92@103.099,48.997 pad.93@100.686,44.425 pad.94@103.099,44.348 pad.95@105.512,44.348 pad.96@90.272,37.414 pad.97@90.272,34.112 pad.98@93.472,35.382 pad.99@93.472,36.322 pad.100@103.886,29.972 pad.101@104.927,29.972 pad.102@105.867,29.972 pad.103@104.318,30.912 pad.104@105.562,30.937 pad.105@100.254,49.809 pad.106@100.254,50.724 pad.107@99.149,48.908 pad.108@99.847,48.997 pad.109@100.051,56.337 pad.110@99.492,56.921 pad.111@94.793,47.098 pad.112@93.491,47.098 pad.113@93.269,48.209 pad.115@92.964,47.6 pad.116@97.765,52.299 pad.117@86.335,51.435 pad.118@86.335,49.632 pad.119@86.335,47.727 pad.120@86.081,57.201 pad.121@86.055,55.397 pad.122@85.42,58.979 pad.123@85.42,67.234 pad.124@86.716,67.259 pad.125@88.011,67.259 pad.126@85.268,72.619 pad.127 pad.128 pad.129 pad.130 pad.131 pad.132@90.983,76.708 pad.133@86.944,76.708 pad.134@105.588,42.291 pad.135@105.639,40.284 pad.136@103.099,42.037 pad.137@103.124,40.259 pad.138@100.94,27 pad.139@103.581,26.975 pad.140@106.045,26.975 pad.141@90.068,60.604 pad.142@92.659,68.453 pad.143@93.904,65.253 pad.144@95.834,65.176 pad.145@92.913,62.408 pad.146@94.183,60.528 pad.147@100.076,67.945 R74.1 R75.1 R89.1 U3.7 U22.2 U24.4 U25.3 U25.4 U29.2 | length 5.2
  Top Layer w0.508: U25.3@95.409,47.098 U25.3@95.409,47.263 ; pad.107@98.958,48.92 99.225,49.187 R74.1@99.225,49.809 99.847,49.187 R75.1@99.847,48.349
  Top Layer w0.762: 93.116,47.193 93.212,47.098 pad.112@93.491,47.098 U25.4@94.139,47.098 pad.111@94.793,47.098 U25.3@95.409,47.098
CANH: J8.2 J8.4 R38.2 R40.2 TVS1.1 TVS2.2 | length 34.4
  Top Layer w0.762: R40.2@3.802,67.895 4.293,67.404 v1(4.293,66.065) R38.2@4.293,64.516 ; J8.4@14.503,76.098 15.392,75.209 TVS1.1@15.392,70.917 15.418,70.942 TVS2.2@18.821,70.942 18.821,72.898 22.022,76.098 J8.2@22.123,76.098
  Bottom Layer w0.762: v1(4.293,66.065) 5.88,67.653 7.633,67.653 14.503,74.524 J8.4@14.503,76.098
CANL: J8.1 J8.3 R39.2 R40.1 TVS2.1 | length 35.7
  Top Layer w0.762: R39.2@6.706,64.491 v1(6.706,66.04) 6.706,67.243 R40.1@7.358,67.895 R40.1@7.57,67.895 ; J8.3@18.313,76.098 20.422,78.207 23.825,78.207 J8.1@25.933,76.098 25.933,74.498 TVS2.1@22.377,70.942
  Bottom Layer w0.762: v1(6.706,66.04) 8.255,66.04 J8.3@18.313,76.098
CANRX: C35.1 LED3.2 U1.32 U12.6 | length 52.6
  Top Layer w0.254: U1.32@61.048,51.702 62.293,51.702 v1@62.763,51.232
  Top Layer w0.381: U12.6@20.088,48.692 23.571,48.692 23.622,48.743 v1(23.622,47.981) 23.622,46.823 LED3.2@23.62,46.821
  Bottom Layer w0.254: v1(23.622,47.981) 23.622,46.787 25.349,45.06 59.512,45.06 63.043,48.59 v1(63.043,51.054)
CANTX: C31.2 LED2.2 Q1.1 U1.33 | length 64.2
  Top Layer w0.254: U1.33@61.048,52.202 62.961,52.202 v1(62.992,52.172)
  Top Layer w0.381: LED2.2@23.848,64.906 24.244,64.51 Q1.1@24.244,62.348 24.244,61.709 v1@25.121,60.833 ; v1@25.349,60.604 C31.2@25.971,60.604
  Bottom Layer w0.254: v1(25.095,60.808) 25.019,60.731 25.019,47.473 26.873,45.618 59.36,45.618 62.357,48.616 62.357,50.292 62.128,50.521 62.128,51.765 62.535,52.172 v1(62.992,52.172)
CC: C40.2 J3.3 TVS3.2 U15.2 | length 15.4
  Top Layer w0.381: U15.2@87.31,64.351 C40.2@89.535,64.351
  Top Layer w0.635: J3.3@89.078,76.2 90.856,74.422 TVS3.2@90.856,70.307 90.17,69.621 90.17,65.862 89.535,65.227 C40.2@89.535,64.351
CC-AD: C66.2 C67.2 R93.2 R94.1 U1.19 | length 19.7
  Top Layer w0.254: U1.19@57.248,46.902 57.248,44.124 v1(57.252,44.12) ; v1(67.513,44.094) 68.034,43.574 C67.2@69.088,43.574
  Top Layer w0.381: C67.2@69.088,43.574 69.164,43.497 R93.2@73.939,43.497
  Bottom Layer w0.254: v1(57.252,44.12) 67.488,44.12 v1(67.513,44.094)
CP: D9.1 D9.3 J3.2 L3.1 TVS4.2 | length 14.3
  Top Layer w0.762: J3.2@92.888,76.2 94.513,74.574 94.513,70.333 TVS4.2@94.463,70.282 94.463,68.453 95.377,67.539 L3.1@95.377,66.802 95.402,66.827 97.316,66.827 ; D9.3@97.316,65.722 97.316,66.827 ; D9.1@97.316,67.627 97.316,66.827
CP_OUT: C53.2 D3.1 D3.3 R51.1 R62.1 R66.2 R67.2 U21.2 | length 20.3
  Top Layer w0.508: R51.1@91.72,60.587 92.456,60.587 94.657,58.386 ; R66.2@95.161,54.153 95.161,55.156 94.657,55.66 94.657,58.386 ; U21.2@99.348,63.106 99.073,62.83 D3.1@99.073,58.36 ; R67.2@101.498,57.569 100.47,57.569 99.678,58.36 D3.1@99.073,58.36 ; 94.657,58.386 94.683,58.36 D3.3@97.168,58.36 D3.1@99.073,58.36
CPWM_OUT: R63.1 U1.28 | length 10.2
  Top Layer w0.305: U1.28@61.048,49.702 63.266,49.702 63.881,50.317 63.881,51.714 67.615,55.448 R63.1@68.034,55.448